# EAGLE board PSD_Mount_PCB_v5 (EAGLE 9.7.0)
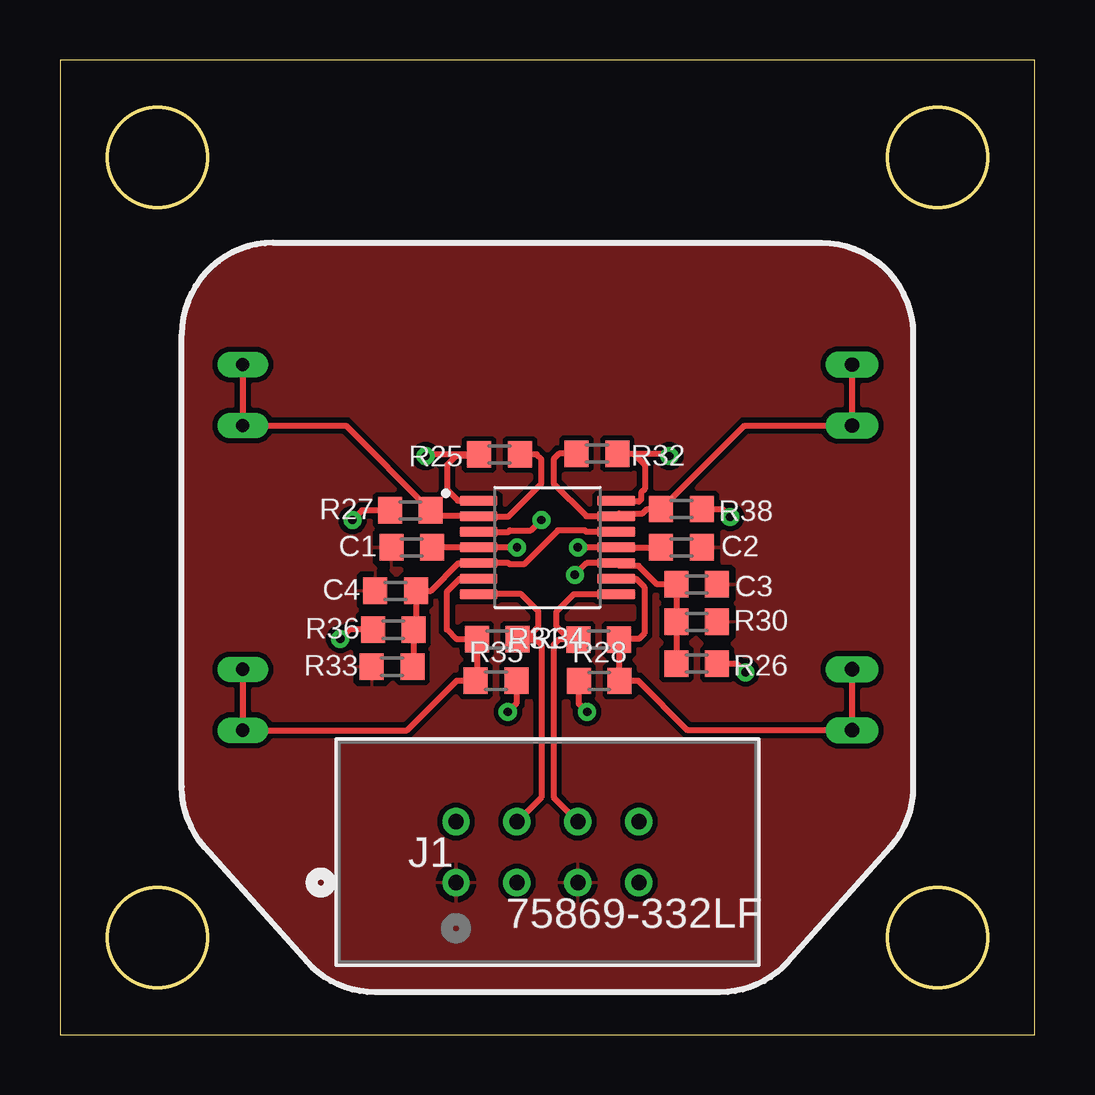
[diagram p0: board, top side]
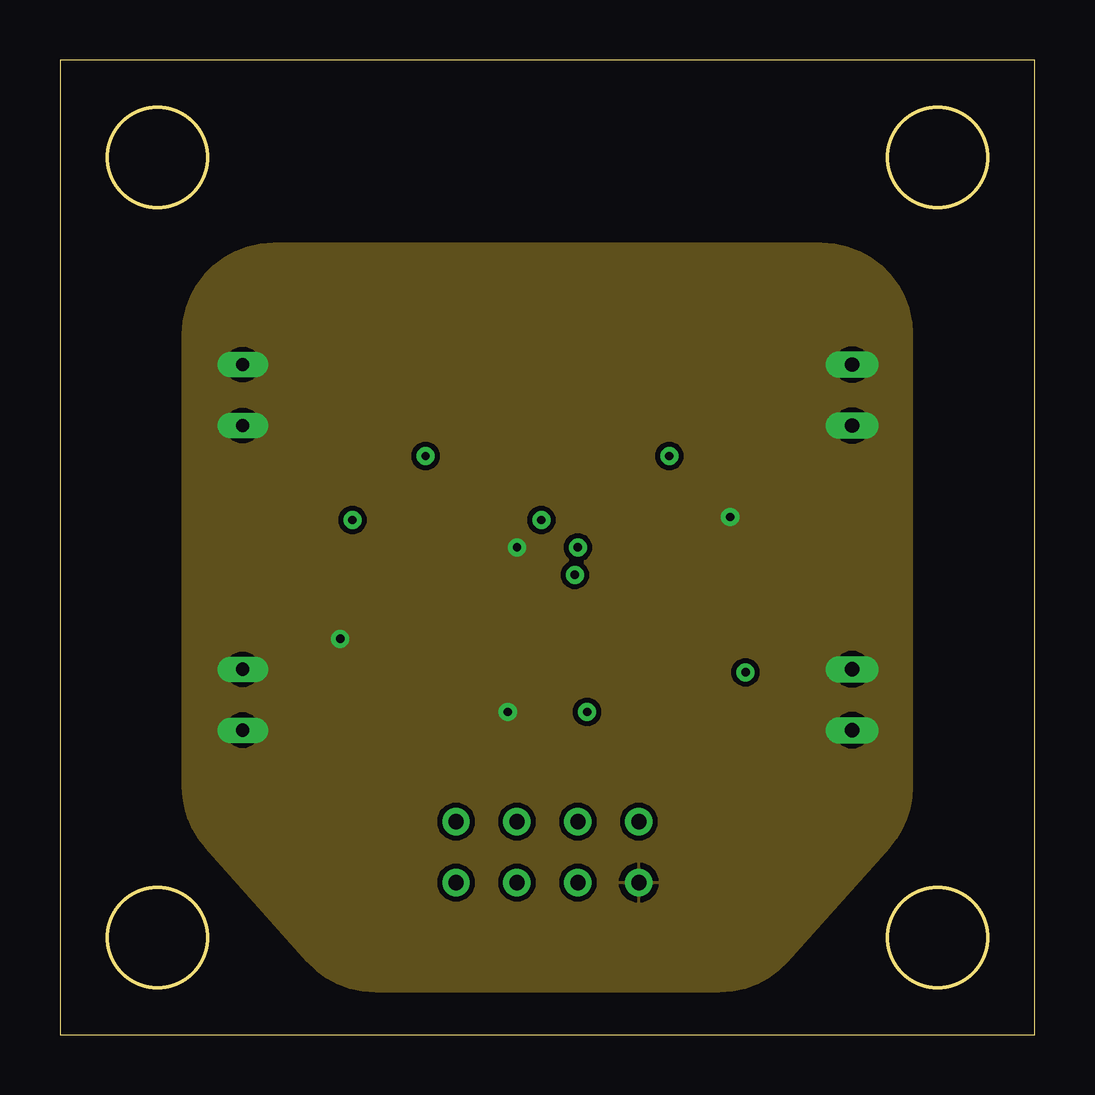
[diagram p1: board, inner layer Route2]
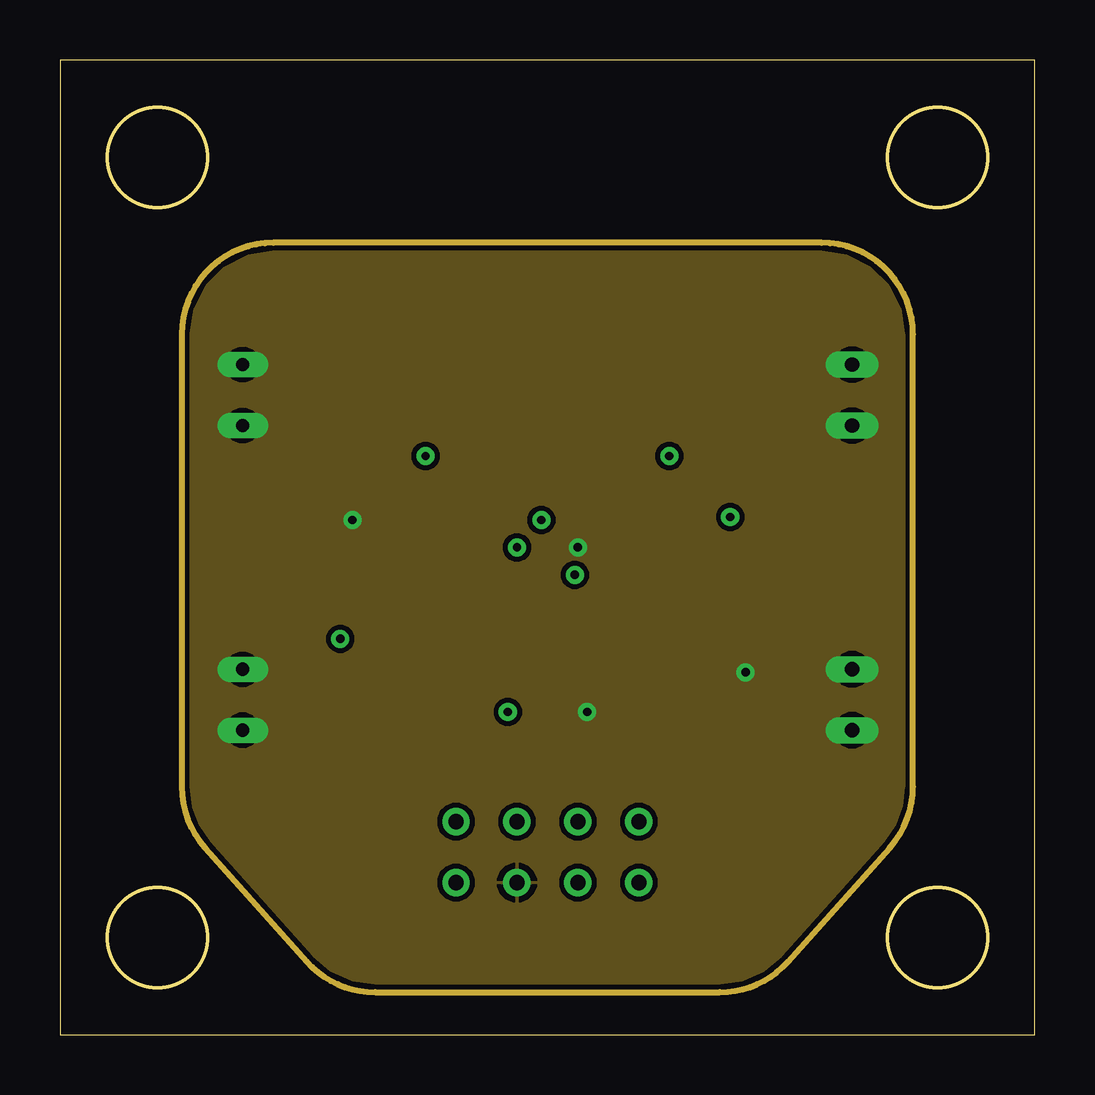
[diagram p2: board, inner layer Route15]
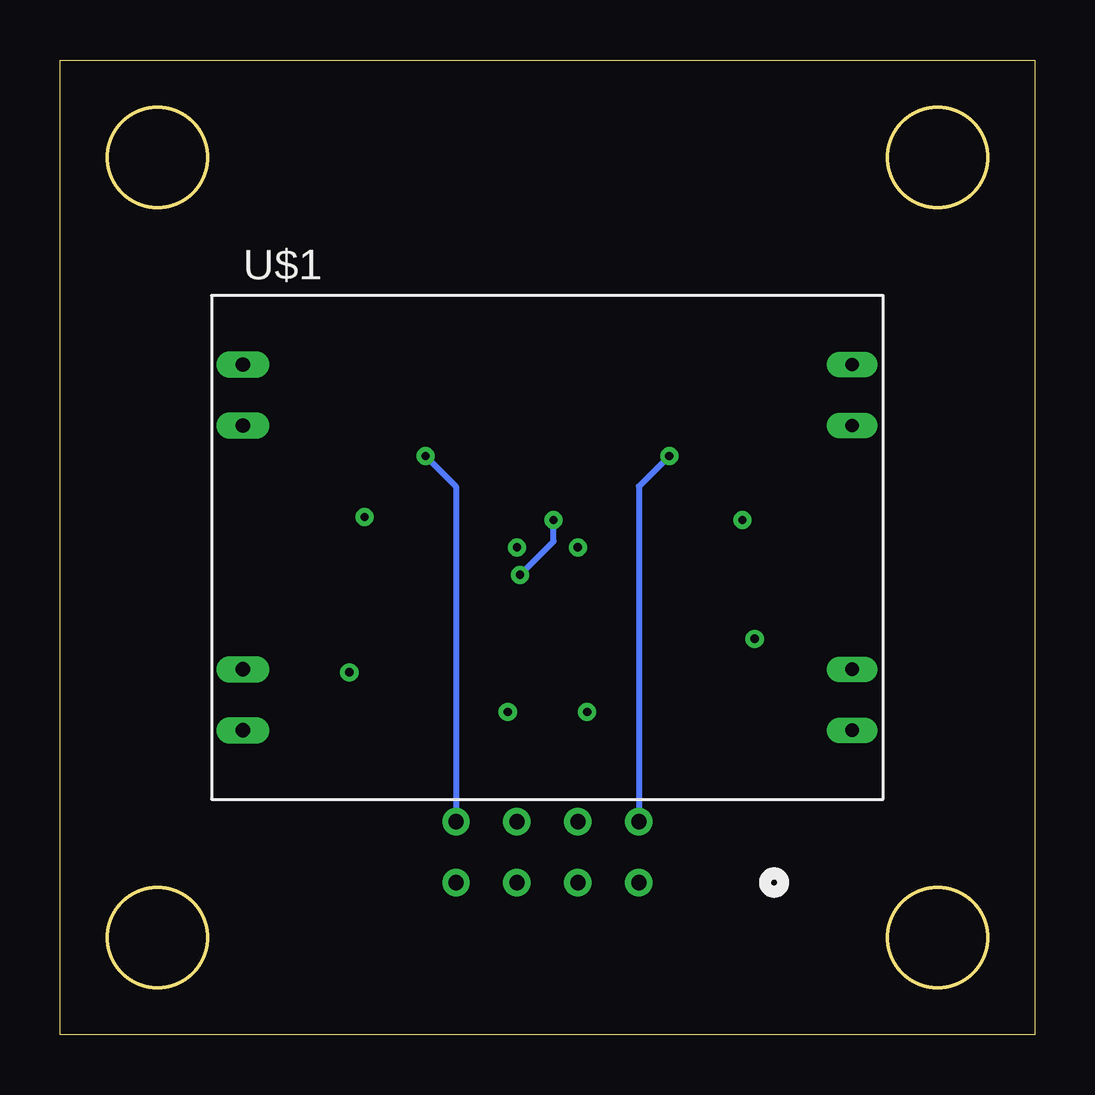
[diagram p3: board, bottom side, seen from below]

Size 40.64 x 40.64 mm. Coordinates in mm from the lower left corner, seen from the top.
Outline: 0,0 40.64,0 40.64,40.64 0,40.64 0,0
Outline: circle at 4.06,4.06 radius 2.08
Outline: circle at 36.58,4.06 radius 2.08
Outline: circle at 36.58,36.58 radius 2.08
Outline: circle at 4.06,36.58 radius 2.08
Copper layers (1+2*15+16): Top 0.035mm / dielectric 1.5mm / Route2 0.035mm / dielectric 0.15mm / Route15 0.035mm / dielectric 0.2mm / Bottom 0.035mm
Design rules "default *": minimum track width 6mil, minimum drill 0.35mm, track to track 8mil, track to pad 8mil, pad to pad 8mil, via to via 8mil, smd to smd 8mil, copper to edge 40mil, drill to drill 6mil, minimum pad ring 10mil, minimum via ring 8mil, stop-mask expansion 4mil, vias tented up to drill 0mil, thermal gap 10mil
Net classes: 0 p: width 0.254 mm; 1 10 mil: width 0.254 mm

## Footprints (pad centres in the part's own frame; a part is rotated, then mirrored left to right if it is on the bottom)
SOP65P640X120-14N = smd 1.57 x 0.41: 1 -2.87,1.95; 2 -2.87,1.3; 3 -2.87,0.65; 4 -2.87,0; 5 -2.87,-0.65; 6 -2.87,-1.3; 7 -2.87,-1.95; 8 2.87,-1.95; 9 2.87,-1.3; 10 2.87,-0.65; 11 2.87,0; 12 2.87,0.65; 13 2.87,1.3; 14 2.87,1.95
0603 = smd 1 x 1.1: 1 -0.85,0; 2 0.85,0
CONN_332LF_AMP = drill 0.635 pad 1.143: 1 0,0; 2 0,2.54; 3 2.54,0; 4 2.54,2.54; 5 5.08,0; 6 5.08,2.54; 7 7.62,0; 8 7.62,2.54
2L10UV_SU7 = drill 0.55 long: X1-1 12.7,-5.08; X1-2 12.7,-7.62; Y1-1 12.7,7.62; Y1-2 12.7,5.08 | drill 0.6 long: X2-1 -12.7,7.62; X2-2 -12.7,5.08; Y2-1 -12.7,-5.08; Y2-2 -12.7,-7.62

## Placement (x,y rotation side)
AMP1  OPA4140  [SOP65P640X120-14N]  20.32,20.32 0 top
C1  [0603]  14.66,20.32 0 top
C2  [0603]  25.91,20.32 180 top
C3  [0603]  26.54,18.78 180 top
C4  [0603]  13.99,18.51 0 top
J1  75869-332LF  [CONN_332LF_AMP]  16.51,6.35 0 top
R25  [0603]  18.32,24.2 180 top
R26  [0603]  26.54,15.48 0 top
R27  [0603]  14.61,21.86 180 top
R28  [0603]  22.48,14.75 180 top
R30  [0603]  26.54,17.22 180 top
R31  [0603]  22.46,16.48 180 top
R32  [0603]  22.38,24.23 180 top
R33  [0603]  13.84,15.35 0 top
R34  [0603]  18.23,16.49 0 top
R35  [0603]  18.18,14.77 180 top
R36  [0603]  13.9,16.89 0 top
R38  [0603]  25.91,21.92 180 top
U$1  2L10UV_SU7  [2L10UV_SU7]  20.32,20.32 0 bottom

## Library data of the parts
AMP1 = OPA4140
C1-C4 R25-R28 R30-R36 R38 = rlc-jqi
J1 = 75869-332LF; BUILT_BY: EMA_Matt; COPYRIGHT: Copyright (C) 2018 Accelerated Designs. All rights reserved; MANUFACTURER_PART_NUMBER: 75869-332LF; SOURCELIBRARY: Amphenol_2019-10-30; VENDOR: Amphenol
U$1 = 2L10UV-MP1

## Nets
15V: AMP1.4 C1.2 J1.7 R35.1 R36.1 R38.1
-15V: AMP1.11 C2.2 J1.3 R26.2 R27.2 R28.2
BIASX: AMP1.5 AMP1.12 C4.2 R33.2 R36.2
BIASY: AMP1.3 AMP1.10 C3.2 R26.1 R30.2
GND: C1.1 C2.1 C3.1 C4.1 J1.1 J1.5 R30.1 R33.1
X1: AMP1.6 R34.1 R35.2 U$1.X1-1 U$1.X1-2
X1_OUT: AMP1.7 J1.4 R34.2
X2: AMP1.13 R32.2 R38.2 U$1.X2-1 U$1.X2-2
X2_OUT: AMP1.14 J1.8 R32.1
Y1: AMP1.2 R25.1 R27.1 U$1.Y1-1 U$1.Y1-2
Y1_OUT: AMP1.1 J1.2 R25.2
Y2: AMP1.9 R28.1 R31.1 U$1.Y2-1 U$1.Y2-2
Y2_OUT: AMP1.8 J1.6 R31.2

## Tracks (layer width: path | path; a pad name or v marks a point on that pad's centre or on a via)
15V  (via drill 0.35)
  Top 0.254: v19.05,20.32 AMP1.4 C1.2 | R38.1 27.61,21.92 v27.94,21.59 | R36.1 12.06,16.89 v11.68,16.51 | R35.1 19.03,13.82 v18.67,13.46
  pour Route2: 5.08,29.21 5.08,10.34 arc42 6.05,7.81 10.29,3.05 arc48 13.14,1.78 27.5,1.78 arc48 30.35,3.05 34.59,7.81 arc42 35.56,10.34 35.56,29.21 arc90 31.75,33.02 8.89,33.02 arc90
-15V  (via drill 0.35)
  Top 0.254: C2.2 AMP1.11 v21.59,20.32 | R26.2 28.21,15.48 v28.57,15.11 | R28.2 21.63,13.8 v21.97,13.46 | R27.2 12.59,21.86 v12.19,21.46
  pour Route15: 5.08,29.21 5.08,10.34 arc42 6.05,7.81 10.29,3.05 arc48 13.14,1.78 27.5,1.78 arc48 30.35,3.05 34.59,7.81 arc42 35.56,10.34 35.56,29.21 arc90 31.75,33.02 8.89,33.02 arc90
BIASX
  Top 0.254: R33.2 14.75,15.4 R36.2 14.84,16.98 C4.2 15.46,18.51 16.62,19.67 AMP1.5 18.7,19.67 18.76,19.61 19.34,19.61 20.76,21.03 21.88,21.03 21.94,20.97 AMP1.12
BIASY  (via drill 0.35)
  Top 0.254: v21.46,19.18 21.96,19.67 AMP1.10 23.3,19.55 24.11,19.55 24.89,18.78 C3.2 R30.2 R26.1 | AMP1.3 18.7,20.97 18.76,21.03 19.63,21.03 v20.07,21.46
  Bottom 0.254: v21.46,19.18 20.07,20.57 v20.07,21.46
GND
  pour Top: 5.08,29.21 5.08,10.34 arc42 6.05,7.81 10.29,3.05 arc48 13.14,1.78 27.5,1.78 arc48 30.35,3.05 34.59,7.81 arc42 35.56,10.34 35.56,29.21 arc90 31.75,33.02 8.89,33.02 arc90
N$1
  Route15 0.254: 5.08,29.21 5.08,10.34 arc42 6.05,7.81 10.29,3.05 arc48 13.14,1.78 27.5,1.78 arc48 30.35,3.05 34.59,7.81 arc42 35.56,10.34 35.56,29.21 arc90 31.75,33.02 8.89,33.02 arc90 5.08,29.21
X1
  Top 0.254: U$1.X1-1 U$1.X1-2 14.48,12.7 16.54,14.77 R35.2 17.38,14.81 R34.1 16.53,16.49 16.13,16.89 16.13,18.48 16.67,19.02 AMP1.6
X1_OUT
  Top 0.254: J1.4 20.07,9.91 20.07,16.26 19.84,16.49 R34.2 19.41,16.49 19.94,17.02 19.94,17.65 19.22,18.37 AMP1.7
X2
  Top 0.254: R32.2 20.8,24.23 20.57,24 20.57,22.99 21.94,21.62 AMP1.13 23.3,21.73 24.29,21.73 24.47,21.92 R38.2 28.54,25.4 U$1.X2-2 U$1.X2-1
X2_OUT  (via drill 0.35)
  Top 0.254: AMP1.14 23.23,22.23 24.13,22.23 24.23,22.32 24.23,22.61 24.38,22.76 24.38,23.75 23.91,24.23 R32.1 25.3,24.23 v25.4,24.13
  Bottom 0.254: v25.4,24.13 24.13,22.86 J1.8
Y1
  Top 0.254: R25.1 19.87,24.2 20.07,24 20.07,22.99 18.67,21.59 17.48,21.59 AMP1.2 15.7,21.62 R27.1 11.92,25.4 U$1.Y1-2 U$1.Y1-1
Y1_OUT  (via drill 0.35)
  Top 0.254: AMP1.1 16.59,22.27 16.13,22.73 16.13,23.75 16.51,24.13 17.41,24.13 R25.2 15.31,24.2 v15.24,24.13
  Bottom 0.254: v15.24,24.13 16.51,22.86 J1.2
Y2
  Top 0.254: U$1.Y2-1 U$1.Y2-2 26.16,12.7 24.11,14.76 R28.1 23.31,14.78 R31.1 23.34,16.51 24.13,16.51 24.36,16.73 24.36,18.67 24,19.02 AMP1.9
Y2_OUT
  Top 0.254: J1.6 20.57,9.91 20.57,16.26 20.8,16.48 R31.2 21.24,16.48 20.7,17.02 20.7,17.65 21.42,18.37 AMP1.8